# EAGLE board BluetoothMainBoard (EAGLE 7.5.0)
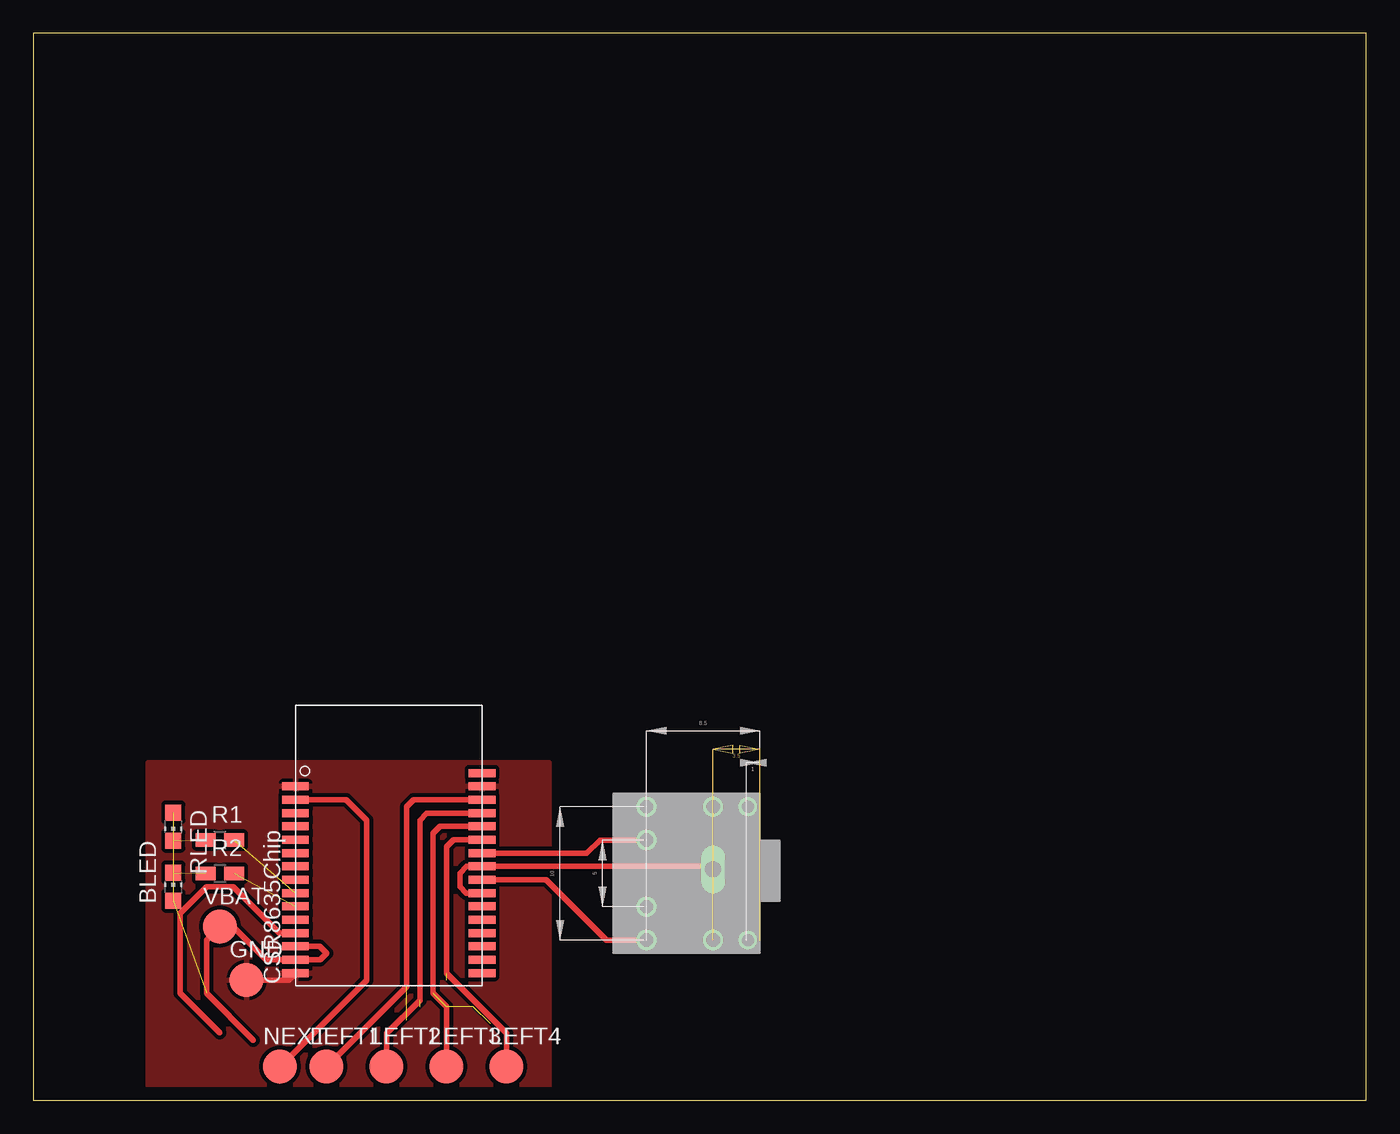
[diagram p0: board, top side]

Size 100 x 80 mm. Coordinates in mm from the lower left corner, seen from the top.
Outline: 0,0 100,0 100,80 0,80 0,0
Copper layers (1*16): Top 0.035mm / dielectric 1.5mm / Bottom 0.035mm
Design rules "default": minimum track width 10mil, minimum drill 24mil, track to track 8mil, track to pad 8mil, pad to pad 8mil, via to via 8mil, smd to smd 8mil, copper to edge 40mil, drill to drill 8mil, minimum pad ring 10mil, minimum via ring 8mil, stop-mask expansion 4mil, vias tented up to drill 0mil, thermal gap 10mil

## Footprints (pad centres in the part's own frame; a part is rotated, then mirrored left to right if it is on the bottom)
CHIP-LED0805 = smd 1.2 x 1.2: A 0,-1.05; C 0,1.05
B2,54 = smd 2.54 x 2.54: TP 0,0
R0805W = smd 1.5 x 1: 1 -1.052,0; 2 1.052,0
CSR8635PACKAGE = smd 2 x 0.6: 1 -7,3.2; 2 -7,2.2; 3 -7,1.2; 4 -7,0.2; 5 -7,-0.8; 6 -7,-1.8; 7 -7,-2.8; 8 -7,-3.8; 9 -7,-4.8; 10 -7,-5.8; 11 -7,-6.8; 12 -7,-7.8; 13 -7,-8.8; 14 -7,-9.8; 15 -7,-10.8; 16 7,-10.8; 17 7,-9.8; 18 7,-8.8; 19 7,-7.8; 20 7,-6.8; 21 7,-5.8; 22 7,-4.8; 23 7,-3.8; 24 7,-2.8; 25 7,-1.8; 26 7,-0.8; 27 7,0.2; 28 7,1.2; 29 7,2.2; 30 7,3.2; 31 7,4.2
K3610 = drill 0.9: P$5 -5,-7.6; P$6 5,-7.6 | drill 1: P$7 -5,-5; P$8 5,-5; P$N2 5,0; P$N3 -5,0; P$N4 2.5,0; P$N5 -2.5,0 | drill 1.2 long: P$N1 0.3,-5

## Placement (x,y rotation side)
BLED  [CHIP-LED0805]  10.5,16 0 top
GND  TPSQB2,54  [B2,54]  16,9 0 top
LEFT1  TPSQB2,54  [B2,54]  22,2.5 0 top
LEFT2  TPSQB2,54  [B2,54]  26.5,2.5 0 top
LEFT3  TPSQB2,54  [B2,54]  31,2.5 0 top
LEFT4  TPSQB2,54  [B2,54]  35.5,2.5 0 top
NEXT  TPSQB2,54  [B2,54]  18.5,2.5 0 top
R1  330  [R0805W]  14,19.5 0 top
R2  330  [R0805W]  14,17 0 top
RLED  [CHIP-LED0805]  10.5,20.5 180 top
U$1  [CSR8635PACKAGE]  26.67,20.32 0 top
U$2  K3610  [K3610]  46,17 90 top
VBAT  TPSQB2,54  [B2,54]  14,13 0 top

## Library data of the parts
BLED RLED = led
GND LEFT1-LEFT4 NEXT VBAT = testpad
R1 R2 = rcl
U$1 U$2 = CSR8635

## Nets
1V8: U$1.12
BTN_BACK: LEFT1.TP U$1.29
BTN_NEXT: NEXT.TP U$1.2
GND: GND.TP U$1.1 U$1.15 U$1.30
LED_B: R2.2 U$1.10
LED_R: R1.2 U$1.9
N$1: R1.1 RLED.C
N$2: U$1.25 U$2.P$N4
N$4: U$1.22 U$1.24 U$2.P$N1
N$6: BLED.C R2.1
N$7: LEFT2.TP U$1.28
N$8: LEFT3.TP U$1.27
N$9: LEFT4.TP U$1.26
N$10: U$1.23 U$2.P$N3
VBAT: BLED.A RLED.A U$1.13 U$1.14 VBAT.TP
VREG: U$1.11

## Tracks (layer width: path | path; a pad name or v marks a point on that pad's centre or on a via)
1V8
  Top 0.406: 13.97,5.03 11,8 11,14 13,16 15,16 18.48,12.52 U$1.12
BTN_BACK  (1 unrouted)
  Top 0.406: U$1.29 28.52,22.52 28,22 28,8.5 LEFT1.TP
BTN_NEXT
  Top 0.406: U$1.2 23.48,22.52 25,21 25,9 NEXT.TP
GND
  Top 0.406: GND.TP 19.15,9 U$1.15
  pour Top (isolate 0.305): 8.62,25.29 38.69,25.29 38.69,0 8.62,0
LED_B  (1 unrouted)
LED_R  (1 unrouted)
N$1  (1 unrouted)
N$2
  Top 0.406: U$1.25 41.52,18.52 42.5,19.5 U$2.P$N4
N$4
  Top 0.406: U$1.22 32.48,15.52 32,16 32,17 32.52,17.52 U$1.24 50.78,17.52 U$2.P$N1
N$6  (1 unrouted)
N$7  (1 unrouted)
  Top 0.406: U$1.28 29.52,21.52 29,21 29,7.5 26.5,5 LEFT2.TP
N$8  (3 unrouted)
  Top 0.406: U$1.27 30.52,20.52 30,20 30,8 31,7 LEFT3.TP
N$9  (1 unrouted)
  Top 0.406: U$1.26 31.52,19.52 31,19 31,9.5 35.5,5 LEFT4.TP
N$10
  Top 0.406: U$1.23 38.48,16.52 43,12 U$2.P$N3
VBAT  (2 unrouted)
  Top 0.406: U$1.13 21.48,11.52 22,11 21.52,10.52 U$1.14 17.48,10.52 15,13 VBAT.TP 13,12 13,8 16.51,4.49